# Altium PCB PCB1.PcbDoc (part 1 of 2)
Units mm, origin at the board's own origin, x right, y up, seen from the top; angles counter-clockwise.
Board outline 120.73 x 162.56 mm, 2 copper layers (Top Layer, Bottom Layer); 171 components, 125 nets, 579 pads, 168 vias.
Unrouted connection lines stored in the file: 14.
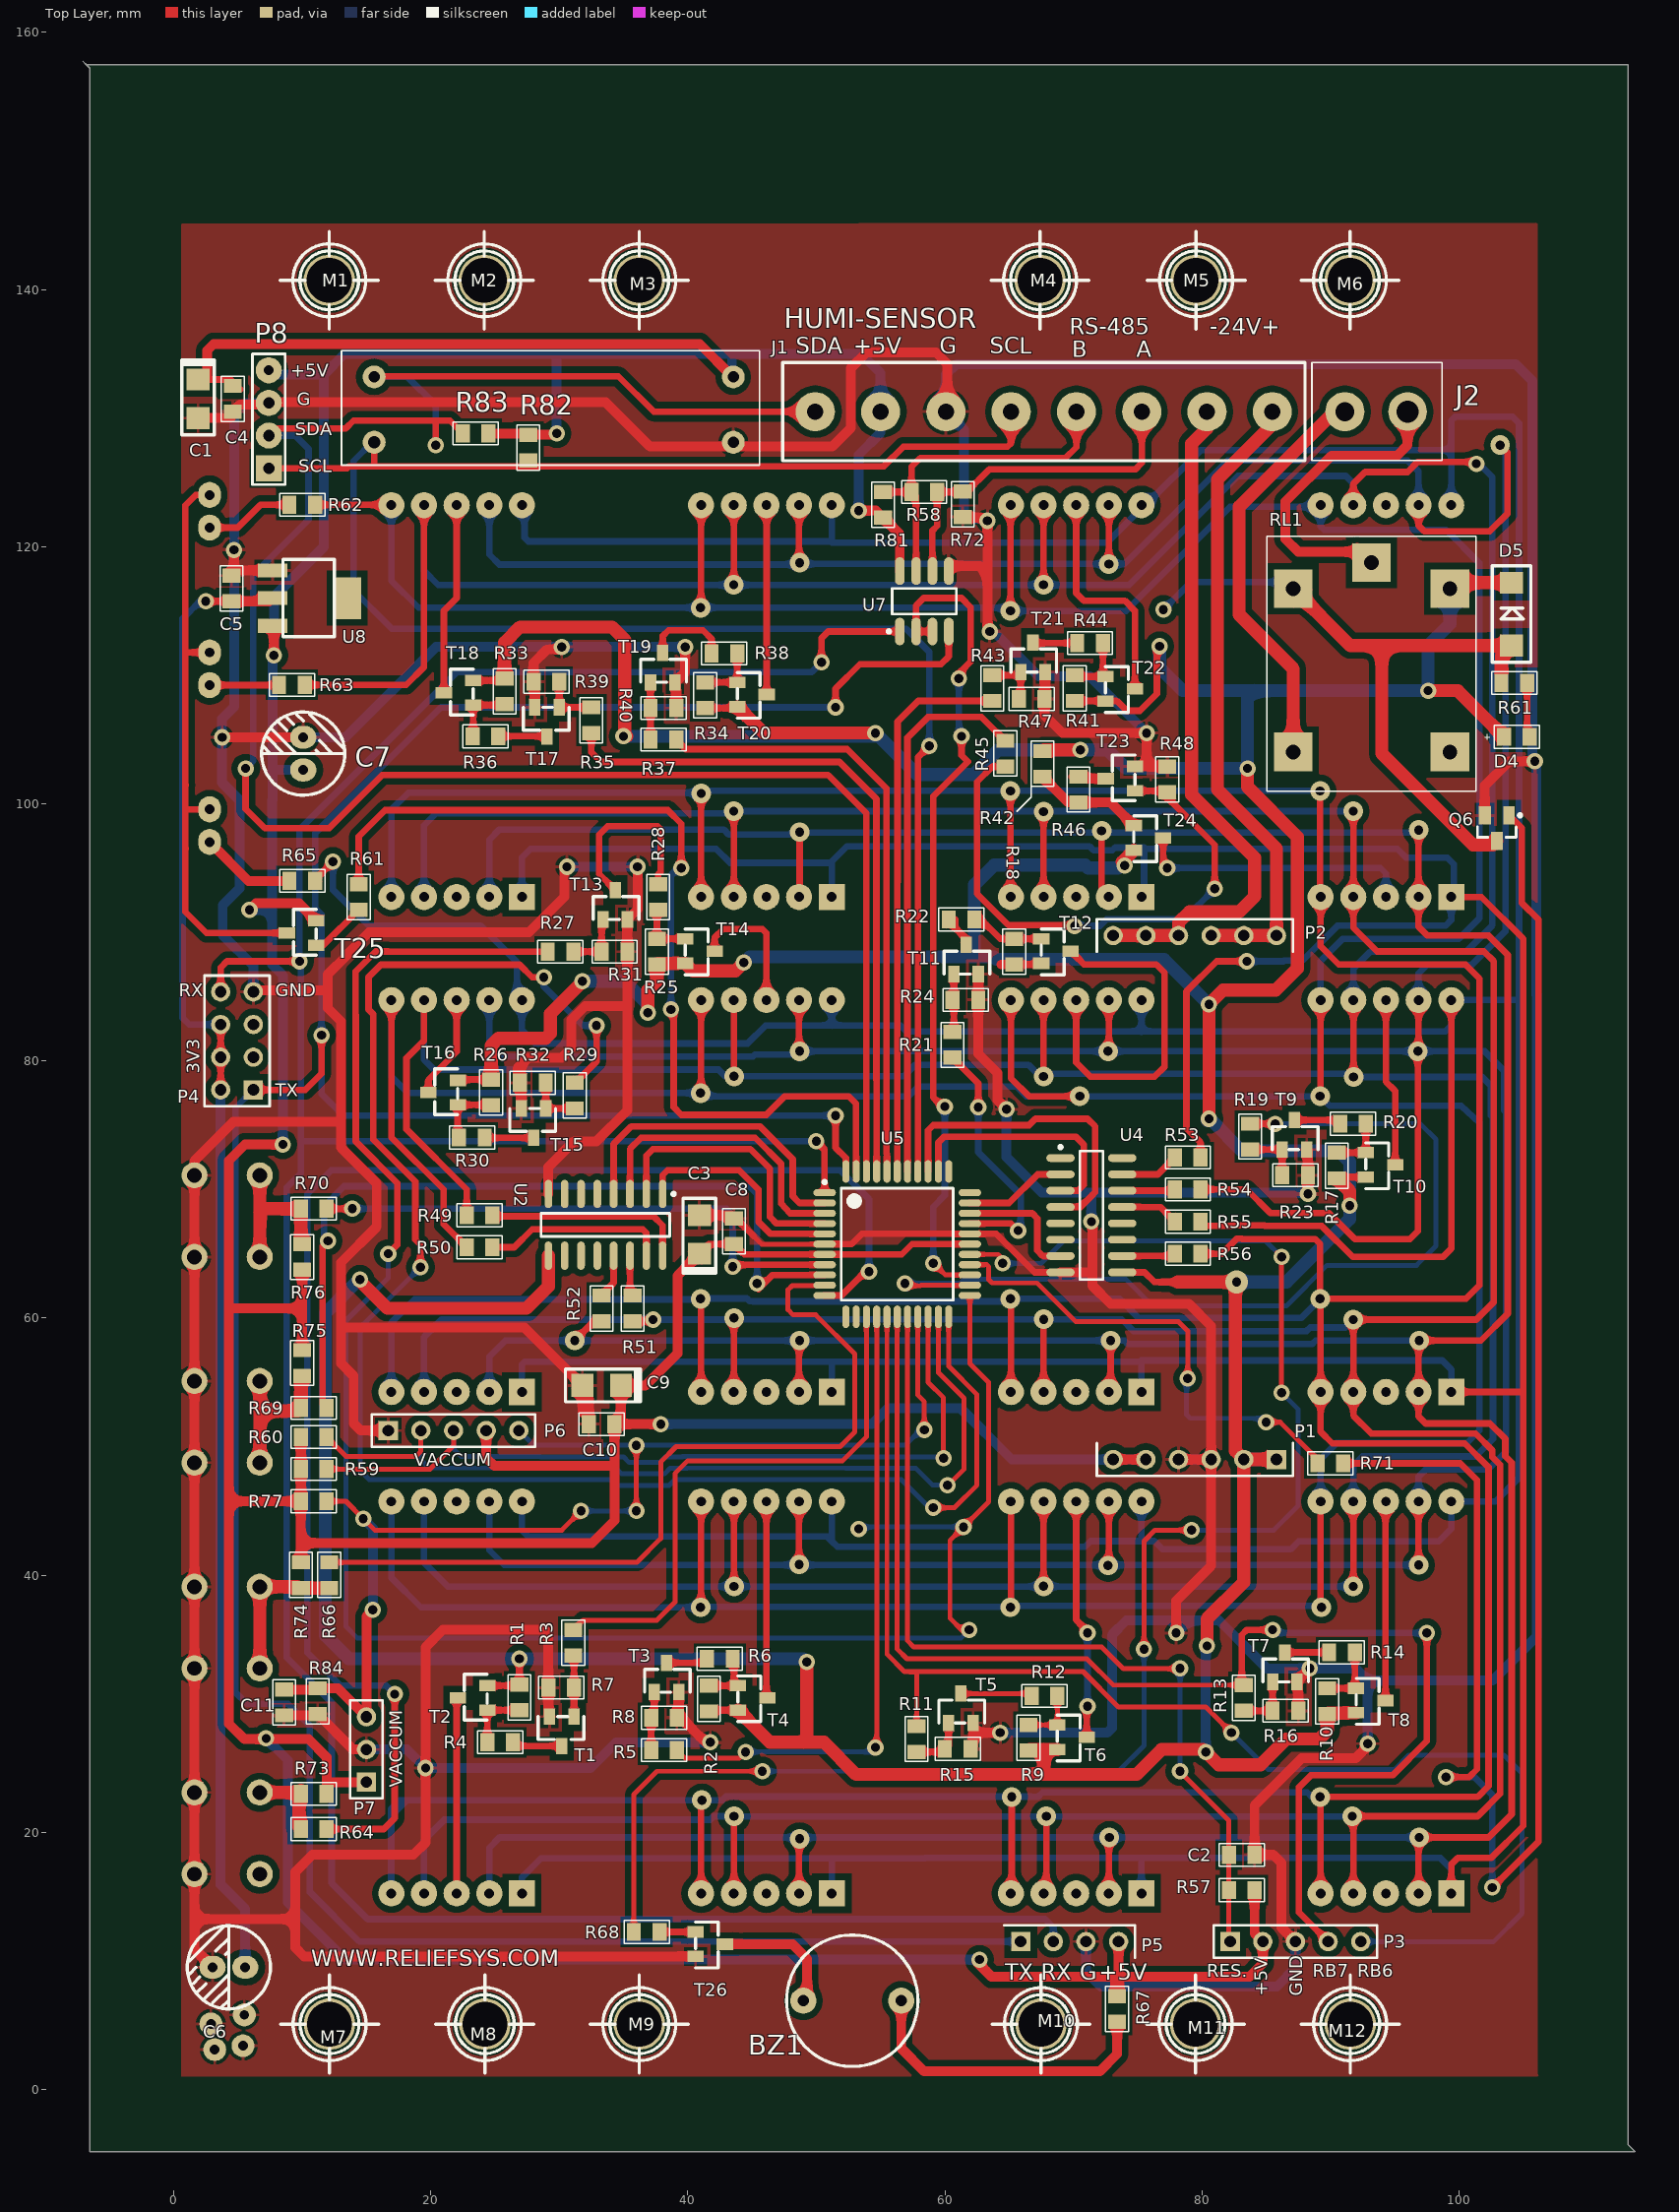
[diagram p0: Top Layer view]
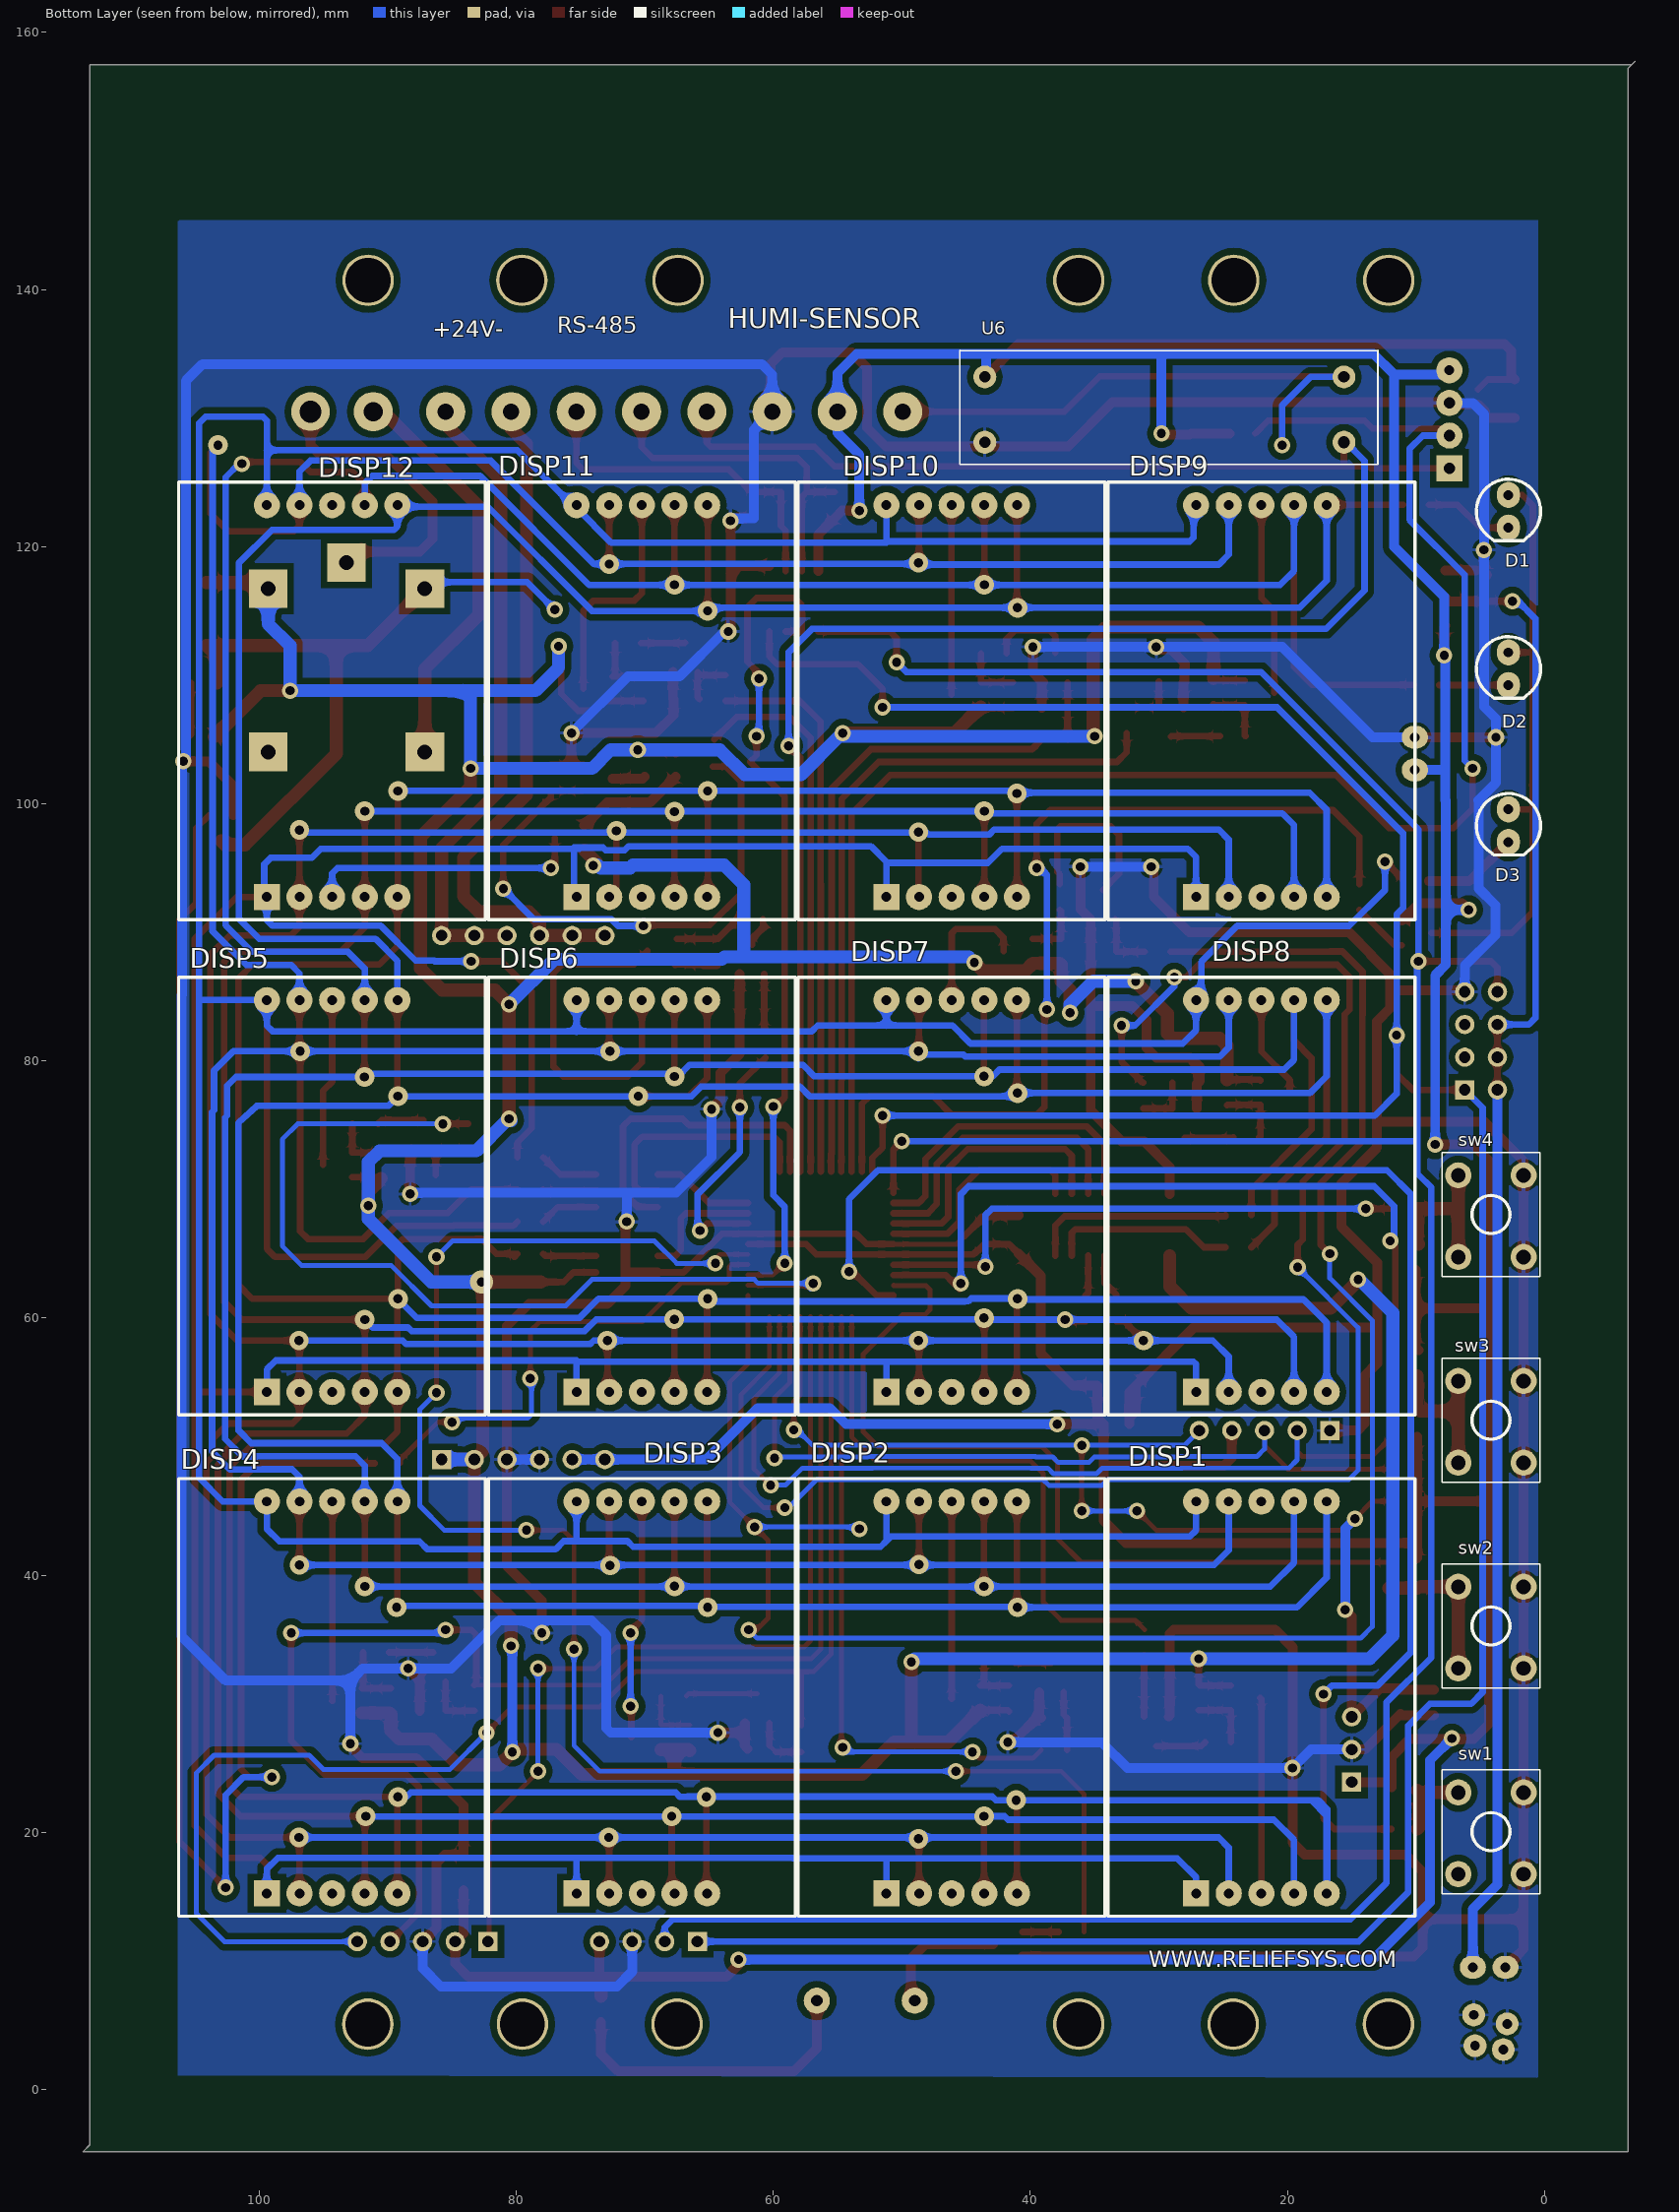
[diagram p1: Bottom Layer view, seen from below]

## Layer stack, top to bottom
Top Solder: solder mask 0.0102, Solder Resist, Dk 3.5
Top Layer: signal copper 0.0356
Dielectric 1: dielectric 0.32, FR-4, Dk 4.8
Bottom Layer: signal copper 0.0356
Bottom Solder: solder mask 0.0102, Solder Resist, Dk 3.5

## Board outline
-6.52,-4.826 -6.52,139.954 -6.52,157.214 -7.04,157.734 -6.786,157.48 113.17,157.48 113.17,-4.306 113.69,-4.826

## Design rules (kind name [scope] priority, off if disabled: settings)
Clearance [All] p1: gap=0.508
PolygonConnect [All] p1: connectstyle=Relief reliefconductorwidth=0.254 reliefentries=4 polygonreliefangle="90 Angle" airgapwidth=0.254
RoutingVias [All] p1: holewidth=0.711 width=1.27 viastyle="Through Hole" minholewidth=0.711 minwidth=1.27 maxholewidth=0.711 maxwidth=1.27
SolderMaskExpansion [All] p1: expansion=0.102
UnpouredPolygon [All] p1: allowunpoured=FALSE
Width [All] p1: maxlimit=5.08 minlimit=0.254 preferedwidth=0.254
29 further rules are at their usual default settings.

## Classes and differential pairs
component class Sheet1: M1 M2 M3 M4 M5 M6 M7 M8 M9 M10 M11 M12 R1 R2 R3 R4 R5 R6 R7 R8 R9 R10 R11 R12 R13 R14 R15 R16 R17 R18 R19 R20 R21 R22 R23 R24 T1 T2 T3 T4 T5 T6 T7 T8 T9 T10 T11 T12
component class Sheet2: R25 R26 R27 R28 R29 R30 R31 R32 R33 R34 R35 R36 R37 R38 R39 R40 R41 R42 R43 R44 R45 R46 R47 R48 T13 T14 T15 T16 T17 T18 T19 T20 T21 T22 T23 T24
component class Sheet3: DISP1 DISP2 DISP3 DISP4 DISP5 DISP6 DISP7 DISP8 DISP9 DISP10 DISP11 DISP12
component class Sheet4: BZ1 C9 C10 C11 D1 D2 D3 P6 P7 R59 R60 R61 R62 R63 R64 R65 R66 R67 R68 R69 R70 R73 R74 R75 R76 R77 R84 sw1 sw2 sw3 sw4 T25 T26
component class Sheet5: C1 C5 C6 C7 P1 P2 P4 P5 R49 R50 R51 R52 R53 R54 R55 R56 U2 U4 U8
component class Sheet6: C2 C3 C4 C8 D4 D5 J1 J2 P3 P8 Q6 R57 R58 R61 R71 R72 R81 R82 R83 RL1 U5 U6 U7

## Components (designator, comment, footprint, x,y, rotation, side; value= is the part's Value field where it differs from the comment)
BZ1 "Buzzer" Buzze 52.8,6.9 r180 top
C1 "CAP" CAPACITOR 1.9,133 r270 top
C2 "Cap" RES0805 83.1,18.25 r180 top
C3 "CAP" CAPACITOR 40.9,65 r90 top
C4 "Cap" RES0805 4.6,131.5 r270 top
C5 "Cap" RES0805 4.5,116.75 r270 top
C6 "Cap" CAP_220uF#1 4.3,9.5 r180 top
C7 "Cap" CAP_220uF#2 10.082,103.9 r90 top
C8 "Cap" RES0805 43.6,66.75 r90 top
C9 "CAP" CAPACITOR 34.8,54.75 r180 top
C10 "Cap" RES0805 33.3,51.75 r180 top
C11 "Cap" RES0805 8.6,30.1 r90 top
D1 "LED" LED3MM 2.8,122.75 r270 bottom
D2 "LED" LED3MM 2.8,110.5 r270 bottom
D3 "LED" LED3MM 2.8,98.3 r270 bottom
D4 "LED" 0805_led 103.5,105.2 r0 top
D5 "DIODE-SS14" DO-214AC 104.1,115.1 r270 top
DISP1 "SP100012AR" SP10012AR-HILIGHT 27.1,15.25 r90 bottom
DISP2 "SP100012AR" SP10012AR-HILIGHT 51.2,15.25 r90 bottom
DISP3 "SP100012AR" SP10012AR-HILIGHT 75.3,15.25 r90 bottom
DISP4 "SP100012AR" SP10012AR-HILIGHT 99.4,15.25 r90 bottom
DISP5 "SP100012AR" SP10012AR-HILIGHT 99.4,54.25 r90 bottom
DISP6 "SP100012AR" SP10012AR-HILIGHT 75.3,54.25 r90 bottom
DISP7 "SP100012AR" SP10012AR-HILIGHT 51.2,54.25 r90 bottom
DISP8 "SP100012AR" SP10012AR-HILIGHT 27.1,54.25 r90 bottom
DISP9 "SP100012AR" SP10012AR-HILIGHT 27.1,92.75 r90 bottom
DISP10 "SP100012AR" SP10012AR-HILIGHT 51.2,92.75 r90 bottom
DISP11 "SP100012AR" SP10012AR-HILIGHT 75.3,92.75 r90 bottom
DISP12 "SP100012AR" SP10012AR-HILIGHT 99.4,92.75 r90 bottom
J1 "HEADER 8" "HEADER AC" 67.7,130.5 r90 top
J2 "Header2" HEADER2 96,130.5 r180 top
M1 "MH" "Mounting hole" 12.11,140.716 r0 top
M2 "MH" "Mounting hole" 24.17,140.716 r0 top
M3 "MH" "Mounting hole" 36.23,140.716 r0 top
M4 "MH" "Mounting hole" 67.41,140.716 r0 top
M5 "MH" "Mounting hole" 79.55,140.716 r0 top
M6 "MH" "Mounting hole" 91.52,140.716 r0 top
M7 "MH" "Mounting hole" 12.13,5.08 r0 top
M8 "MH" "Mounting hole" 24.21,5.08 r0 top
M9 "MH" "Mounting hole" 36.23,5.08 r0 top
M10 "MH" "Mounting hole" 67.48,5.08 r0 top
M11 "MH" "Mounting hole" 79.51,5.08 r0 top
M12 "MH" "Mounting hole" 91.54,5.08 r0 top
P1 "Header 6" HDR1X6#1 85.8,49 r180 top
P2 "Header 6" HDR1X6#2 73.1,89.75 r0 top
P3 "Header 5" HDR1X5 82.2,11.5 r0 top
P4 "Header 4X2A" HDR2X4_CEN 6.2,77.75 r90 top
P5 "Header 4" HDR1X4#1 65.9,11.5 r0 top
P6 "Header 5" HDR1X5 16.7,51.25 r0 top
P7 "Header 3" HDR1X3 15,23.9 r90 top
P8 "Header 4" HDR1X4#2 7.4,126.1 r90 top
Q6 "BC547." SOT23_L 103.9,99.1 r270 top
R1 "Res" RES0805 26.9,30.5 r90 top
R2 "Res" RES0805 41.65,30.4 r270 top
R3 "Res" RES0805 31.1,34.75 r90 top
R4 "Res" RES0805 25.4,27 r0 top
R5 "Res" RES0805 38.15,26.4 r0 top
R6 "Res" RES0805 42.5,33.5 r180 top
R7 "Res" RES0805 30.15,31.25 r180 top
R8 "Res" RES0805 38.15,28.9 r0 top
R9 "Res" RES0805 66.5,27.35 r270 top
R10 "Res" RES0805 89.75,30.2 r270 top
R11 "Res" RES0805 57.8,27.25 r90 top
R12 "Res" RES0805 67.75,30.6 r180 top
R13 "Res" RES0805 83.25,30.45 r90 top
R14 "Res" RES0805 90.9,34 r180 top
R15 "Res" RES0805 61,26.5 r0 top
R16 "Res" RES0805 86.5,29.45 r0 top
R17 "Res" RES0805 90.5,71.861 r270 top
R18 "Res" RES0805 65.4,88.5 r270 top
R19 "Res" RES0805 83.75,74.111 r90 top
R20 "Res" RES0805 91.75,75.111 r180 top
R21 "Res" RES0805 60.6,81.25 r270 top
R22 "Res" RES0805 61.3,91 r180 top
R23 "Res" RES0805 87.25,71.111 r0 top
R24 "Res" RES0805 61.6,84.75 r0 top
R25 "Res" RES0805 37.6,88.5 r270 top
R26 "Res" RES0805 24.7,77.55 r90 top
R27 "Res" RES0805 30.1,88.5 r180 top
R28 "Res" RES0805 37.7,92.75 r90 top
R29 "Res" RES0805 31.2,77.3 r90 top
R30 "Res" RES0805 23.2,74.05 r0 top
R31 "Res" RES0805 34.3,88.5 r0 top
R32 "Res" RES0805 27.95,78.3 r180 top
R33 "Res" RES0805 25.75,108.75 r90 top
R34 "Res" RES0805 41.35,108.45 r270 top
R35 "Res" RES0805 32.5,106.5 r270 top
R36 "Res" RES0805 24.25,105.25 r0 top
R37 "Res" RES0805 38.1,105 r0 top
R38 "Res" RES0805 42.85,111.7 r180 top
R39 "Res" RES0805 29,109.5 r180 top
R40 "Res" RES0805 38.1,107.45 r0 top
R41 "Res" RES0805 70.1,109 r270 top
R42 "Res" RES0805 67.6,103.1 r90 top
R43 "Res" RES0805 63.7,109 r270 top
R44 "Res" RES0805 71.3,112.5 r180 top
R45 "Res" RES0805 64.7,103.9 r90 top
R46 "Res" RES0805 70.4,101.1 r90 top
R47 "Res" RES0805 66.75,108.15 r0 top
R48 "Res" RES0805 77.3,101.9 r90 top
R49 "Res" RES0805 23.8,68 r180 top
R50 "Res" RES0805 23.8,65.5 r180 top
R51 "Res" RES0805 35.7,60.75 r270 top
R52 "Res" RES0805 33.3,60.75 r270 top
R53 "Res" RES0805 78.9,72.5 r0 top
R54 "Res" RES0805 78.9,70 r0 top
R55 "Res" RES0805 78.9,67.5 r0 top
R56 "Res" RES0805 78.9,65 r0 top
R57 "Res" RES0805 83.1,15.5 r0 top
R58 "Res" RES0805 58.4,124.25 r180 top
R59 "Res" RES0805 10.9,48.25 r0 top
R60 "Res" RES0805 10.9,50.75 r0 top
R61 "Res" RES0805 104.3,109.4 r0 top
R61 "Res" RES0805 14.4,92.75 r270 top
R62 "Res" RES0805 10,123.25 r0 top
R63 "Res" RES0805 9.2,109.25 r0 top
R64 "Res" RES0805 10.9,20.25 r0 top
R65 "Res" RES0805 10,94 r0 top
R66 "Res" RES0805 12.1,40 r90 top
R67 "Res" RES0805 73.4,6.25 r90 top
R68 "Res" RES0805 36.8,12.25 r0 top
R69 "Res" RES0805 10.9,53 r0 top
R70 "Res" RES0805 10.9,68.5 r0 top
R71 "Res" RES0805 90,48.7 r180 top
R72 "Res" RES0805 61.4,123.3 r90 top
R73 "Res" RES0805 10.9,23 r0 top
R74 "Res" RES0805 9.9,40 r90 top
R75 "Res" RES0805 10,56.5 r90 top
R76 "Res" RES0805 10,64.75 r270 top
R77 "Res" RES0805 10.9,45.75 r180 top
R81 "Res" RES0805 55.2,123.25 r90 top
R82 "Res" RES0805 27.6,127.7 r270 top
R83 "Res" RES0805 23.5,128.8 r180 top
R84 "Res" RES0805 11.2,30.2 r270 top
RL1 "RELAY-5pin" RELAY-5pin 93.2,111.4 r90 top
sw1 "Switch-" SWITCH_200/250 6.7,16.75 r90 bottom
sw2 "Switch-" SWITCH_200/250 6.7,32.75 r90 bottom
sw3 "Switch-" SWITCH_200/250 6.7,48.75 r90 bottom
sw4 "Switch-" SWITCH_200/250 6.7,64.75 r90 bottom
T1 "BC848" SOT23 31.15,29 r270 top
T2 "BC857" SOT23 24.4,29.5 r180 top
T3 "BC848" SOT23 37.4,30.9 r90 top
T4 "BC857" SOT23 43.9,31.4 r0 top
T5 "BC848" SOT23 60.3,28.5 r90 top
T6 "BC857" SOT23 68.75,28.35 r0 top
T7 "BC848" SOT23 85.5,31.7 r90 top
T8 "BC857" SOT23 92,31.2 r0 top
T9 "BC848" SOT23 86.25,73.111 r90 top
T10 "BC857" SOT23 92.75,72.861 r0 top
T11 "BC848" SOT23 60.7,86.75 r90 top
T12 "BC857" SOT23 67.5,89.5 r0 top
T13 "BC848" SOT23 33.4,91 r90 top
T14 "BC857" SOT23 39.8,89.5 r0 top
T15 "BC848" SOT23 28.95,76.3 r270 top
T16 "BC857" SOT23 22.1,76.58 r180 top
T17 "BC848" SOT23 30,107.5 r270 top
T18 "BC857" SOT23 23.31,107.68 r180 top
T19 "BC848" SOT23 37.1,109.45 r90 top
T20 "BC857" SOT23 43.85,109.45 r0 top
T21 "BC848" SOT23 65.9,110.25 r90 top
T22 "BC857" SOT23 72.5,109.9 r0 top
T23 "BC848" SOT23 74.8,101 r180 top
T24 "BC857" SOT23 74.7,98.3 r0 top
T25 "BC857" SOT23 11.1,89 r180 top
T26 "BC848" SOT23 40.6,12.25 r0 top
U2 "ULN2003AD" D016_N 33.6,67.25 r270 top
U4 "ULN2003AD" D016_N 71.4,68 r0 top
U5 "PIC16F887T-E/PT" TQFP-PT44_N 56.3,65.75 r0 top
U6 "Humi-sen-v3" HUMI-SEN 15.6,133.2 r180 bottom
U7 "RS485" RS485 58.4,115.75 r90 top
U8 "Reg" LM1117 10.6,116 r270 top

## Footprints (in the part's own frame and the unit in brackets; to place one, negate y for a bottom-side part, rotate by r counter-clockwise, add the part's x,y. Pads: shape width x height; smd on the part's side, far side on the other; paste and mask are expansions set on the pad)
0805_led [mm]
  rect 1.1x1.4 smd: 1(0,0) 2(2,0)
  silkscreen extent -1.5,-0.89 2.77,0.89
Buzze [mil]
  round 80 hole 35: 1(-150,0) 2(150,0)
  silkscreen extent -201,-201 201,201
CAP_220uF#1 [mil]
  oval 80x70 hole 30: 1(-50,0) 2(50,0)
  silkscreen extent -127,-127 127,127
CAP_220uF#2 [mil]
  oval 70x80 hole 30: 1(-50,0) 2(50,0)
  silkscreen extent -127,-127 127,127
CAPACITOR [mm]
  rect 1.7x1.8 smd: 1(0,0) 2(3,0)
  silkscreen extent -1.52,-1.27 4.32,1.27
D016_N [mm] "SOIC, 16-Leads, Body 9.9x3.9mm, Pitch 1.27mm, IPC Medium Density"
  oval 2.2x0.6 smd: 1(-2.4,4.445) 2(-2.4,3.175) 3(-2.4,1.905) 4(-2.4,0.635) 5(-2.4,-0.635) 6(-2.4,-1.905) 7(-2.4,-3.175) 8(-2.4,-4.445) 9(2.4,-4.445) 10(2.4,-3.175) 11(2.4,-1.905) 12(2.4,-0.635) 13(2.4,0.635) 14(2.4,1.905) 15(2.4,3.175) 16(2.4,4.445)
  silkscreen extent -2.52,-5 0.9,5.42, body extent -2,-5 2,5, height 1.75
DO-214AC [mm] "SMD DIODE"
  rect 1.7x1.8 smd: 1(2.8,0) 2(-2.1,0)
  silkscreen extent -3.4,-1.5 4.1,1.5
HDR1X3 [mm] "Connector; Header; 3 Position"
  rect 1.5x1.5 hole 0.9: 1(0,0)
  round 1.5 hole 0.9: 2(2.54,0) 3(5.08,0)
  silkscreen extent -1.27,-1.27 6.35,1.27
HDR1X4#1 [mm] "Connector; Header; 4 Position"
  rect 1.5x1.5 hole 0.9: 1(0,0)
  round 1.5 hole 0.9: 2(2.54,0) 3(5.08,0) 4(7.62,0)
  silkscreen extent -1.27,-1.27 8.89,1.27
HDR1X4#2 [mm] "Connector; Header; 4 Position"
  rect 2.032x2.032 hole 0.889: 1(0,0)
  round 2.032 hole 0.889: 2(2.54,0) 3(5.08,0)
  round 2.032 hole 0.762: 4(7.62,0)
  silkscreen extent -1.27,-1.27 8.89,1.27
HDR1X5 [mm] "Connector; Header; 5 Position"
  rect 1.5x1.5 hole 0.9: 1(0,0)
  round 1.5 hole 0.9: 2(2.54,0) 3(5.08,0) 4(7.62,0) 5(10.16,0)
  silkscreen extent -1.27,-1.27 11.43,1.27
HDR1X6#1 [mm] "Connector; Header; 6 Position"
  rect 1.5x1.5 hole 0.9: 1(0,0)
  round 1.5 hole 0.9: 2(2.54,0) 3(5.08,0) 4(7.62,0) 5(10.16,0) 6(12.7,0)
  silkscreen extent -1.27,-1.27 13.97,1.27
HDR1X6#2 [mm] "Connector; Header; 6 Position"
  round 1.5 hole 0.9: 1(0,0) 2(2.54,0) 3(5.08,0) 4(7.62,0) 5(10.16,0) 6(12.7,0)
  silkscreen extent -1.27,-1.27 13.97,1.27
HDR2X4_CEN [mm] "Connector; Header; 4x2 Position"
  rect 1.5x1.5 hole 0.9: 1(0,0)
  round 1.5 hole 0.9: 2(2.54,0) 3(5.08,0) 4(7.62,0) 5(0,2.54) 6(2.54,2.54) 7(5.08,2.54) 8(7.62,2.54)
  silkscreen extent -1.27,-1.27 8.89,3.81
HEADER2 [mil]
  round 118.11 hole 66.93: 1(0,0)
  round 120 hole 58: 2(192,0)
  silkscreen extent -106,-150 293,150
"HEADER AC" [mil]
  round 120 hole 50: 1(0,700) 2(0,500) 3(0,300) 4(0,100) 5(0,-100) 6(0,-300) 7(0,-500) 8(0,-700)
  silkscreen extent -150,-800 150,800
HUMI-SEN [mil]
  round 70 hole 35: 1(0,0) 3(-1100,-200) 4(-1100,0)
  round 70 hole 37: 2(0,-200)
LED3MM [mil]
  oval 80x70 hole 30: 1(-50,0) 2(50,0)
  silkscreen extent -98,-98 90,98
LM1117 [mm]
  rect 1.1x2.3 smd: 1(-2.15,-2.9) 2(0,-2.9) 3(2.15,-2.9)
  rect 3.25x2.15 smd: 4(0,2.9)
  silkscreen extent -3,-2.1 3,1.9
"Mounting hole" [mm]
  round 4 hole 3.5: ""(0,0)
  silkscreen extent -3.81,-3.81 3.81,3.81
RELAY-5pin [mil] "Relay"
  rect 118.11x118.11 hole 45: 1(210,240) 2(290,0) 3(210,-240) 4(-290,-240) 5(-290,240)
  silkscreen extent -410,-320 370,321
RES0805 [mm]
  rect 1.1x1.4 smd: 1(-1,0) 2(1,0)
  silkscreen extent -1.75,-0.89 1.77,0.89
RS485 [mm] "S0IC 8PIN"
  oval 2.154x0.752 smd: 1(-2.35,1.905) 2(-2.35,0.635) 3(-2.35,-0.635) 4(-2.35,-1.905) 5(2.35,-1.905) 6(2.35,-0.635) 7(2.35,0.635) 8(2.35,1.905)
  silkscreen extent -2.47,-2.5 1,2.88, body extent -1.95,-2.45 1.95,2.45, height 1.75
SOT23 [mil] "SMD DIODE 4148"
  rect 50x35 smd: 1(0,0) 2(0,-75) 3(90,-37.5)
  silkscreen extent 0,-110 70,30
SOT23_L [mm] "SOT23, 3-Leads, Body 2.9x1.3mm, Pitch 0.95mm, Lead Span 2.3mm, IPC High Density"
  rect 1.4x0.89 smd: 1(0,0) 3(2,-0.95)
  rect 1.4x0.96 smd: 2(0,-1.9)
  silkscreen extent -0.12,-2.45 1.7,0.97, body extent 0.3,-2.45 1.7,0.55, height 1.1
SP10012AR-HILIGHT [mil]
  rect 80x80 hole 30: 1(0,0)
  round 80 hole 30: 2(0,-100) 3(0,-200) 4(0,-300) 5(0,-400) 6(1200,-400) 7(1200,-300) 8(1200,-200) 9(1200,-100) 10(1200,0)
  silkscreen extent -70,-670 1270,270
SWITCH_200/250 [mil]
  round 80 hole 45: 1(0,0) 2(0,-200) 3(250,-200) 4(250,0)
  silkscreen extent -60,-250 320,50
TQFP-PT44_N [mm] "Thin QFP, 44-Leads, Body 10x10mm, Pitch 0.8mm, IPC Medium Density"
  oval 1.75x0.55 smd: 1(-5.65,4) 2(-5.65,3.2) 3(-5.65,2.4) 4(-5.65,1.6) 5(-5.65,0.8) 6(-5.65,0) 7(-5.65,-0.8) 8(-5.65,-1.6) 9(-5.65,-2.4) 10(-5.65,-3.2) 11(-5.65,-4) 23(5.65,-4) 24(5.65,-3.2) 25(5.65,-2.4) 26(5.65,-1.6) 27(5.65,-0.8) 28(5.65,0) 29(5.65,0.8) 30(5.65,1.6) 31(5.65,2.4) 32(5.65,3.2) 33(5.65,4)
  oval 0.55x1.75 smd: 12(-4,-5.65) 13(-3.2,-5.65) 14(-2.4,-5.65) 15(-1.6,-5.65) 16(-0.8,-5.65) 17(0,-5.65) 18(0.8,-5.65) 19(1.6,-5.65) 20(2.4,-5.65) 21(3.2,-5.65) 22(4,-5.65) 34(4,5.65) 35(3.2,5.65) 36(2.4,5.65) 37(1.6,5.65) 38(0.8,5.65) 39(0,5.65) 40(-0.8,5.65) 41(-1.6,5.65) 42(-2.4,5.65) 43(-3.2,5.65) 44(-4,5.65)
  silkscreen extent -5.77,-4.35 4.35,4.95, body extent -5,-5 5,5, height 1.2

## Part data
BZ1: library part Buzzer_small, "Buzzer_small"
C1 C3 C9: library part CAP_GT_SMD, "470uf"
C2 C4 C5 C8 C10 C11: library part CAP_104_SMD, "Cap_104_SMD"
C6 C7: library part CAP_220uF, "Cap_220uF"
D1 D2 D3: library part LED_3MM, "LED_3MM"
D4: library part LED_0805, "LED_0805"
D5: "SS14"
DISP1 DISP2 DISP3 DISP4 DISP5 DISP6 DISP7 DISP8 DISP9 DISP10 DISP11 DISP12: "34mm/1200mil"
J1: "AC"
P1 P2: "Header, 6-Pin"
P3 P6: "Header, 5-Pin"
P4: "Header, 4-Pin, Dual row"
P5 P8: "Header, 4-Pin"
P7: "Header, 3-Pin"
Q6: "NPN 1 GHz Wideband Transistor"
R1 R2 R3 R4 R5 R6 R7 R8 R9 R10 R11 R12 R13 R14 R15 R16 R17 R18 R19 R20 R21 R22 R23 R24 R25 R26 R27 R28 R29 R30 R31 R32 R33 R34 R35 R36 R37 R38 R39 R40 R41 R42 R43 R44 R45 R46 R47 R48 R49 R50 R51 R52 R53 R54 R55 R56 R57 R58 R59 R60 R61 R61 R62 R63 R64 R65 R66 R67 R68 R69 R70 R71 R72 R73 R74 R75 R76 R77 R81 R82 R83 R84: library part Resistor, "Res0805"
sw1 sw2 sw3 sw4: "200/250mil"
T1 T3 T5 T7 T9 T11 T13 T15 T17 T19 T21 T23 T26: "TRANSISTOR"
U2 U4: "Darlington Transistor Array"
U5: "Flash-Based, 8-Bit CMOS Microcontroller with nanoWatt Technology, 8K (x14-Bit words) Program Memory, 624 Bytes Data Memory, 35 I/O pins, 44-Pin TQFP, Standard VDD Range, Extended Temperature, Tape and Reel"
U7: "8-Pin SO"
U8: library part LM1117

## Free pads (board coordinates)
  round 1.778 hole 0.762: 0(3.2,3.1) 1(5.4,3.4) 2(2.9,5.1) 3(5.5,5.8)

## Via types
v1: diameter 1.27, hole 0.711, Top Layer to Bottom Layer, 114 vias
v2: diameter 1.524, hole 0.711, Top Layer to Bottom Layer, 53 vias
v3: diameter 1.778, hole 0.711, Top Layer to Bottom Layer, 1 vias

## Nets (pads, with @x,y where several pads share a name; then routed paths per layer and width w, separated by ;. In a path a pad name is that pad's centre, name@x,y a point inside that pad or via, vN(x,y) a via of type N, cw(c..) or ccw(c..) an arc to the next point about the centre after c; other vN are vias at no path point)
3V3: C5.2 C6.1 P4.5 P4.6 P4.7 U8.2 | length 116
  Top Layer w0.508: v1(2.5,115.75) C5.2@4.5,115.75 ; P4.5@3.66,77.75 P4.6@3.66,80.29 P4.7@3.66,82.83
  Top Layer w0.762: C5.2@4.5,115.75 7.45,115.75 U8.2@7.7,116
  Bottom Layer w0.508: v1(2.5,115.75) 2.05,115.75 0.7,114.4 0.7,83.35 1.22,82.83 P4.7@3.66,82.83
  Bottom Layer w0.762: P4.5@3.66,77.75 3.66,15.94 5.57,14.03 C6.1@5.57,9.5
7_SEGMENT1: DISP1.3 DISP1.8 T2.3 | length 15.2
  Top Layer w0.508: DISP1.3@22.02,15.25 22.02,30.359 T2.3@22.114,30.453
7_SEGMENT2: DISP2.3 DISP2.8 T4.3 | length 15.4
  Top Layer w0.508: T4.3@46.12,30.382 T4.3@46.186,30.448 46.12,30.514 DISP2.8@46.12,45.73
7_SEGMENT3: DISP3.3 DISP3.8 T6.3 | length 19.5
  Top Layer w0.508: DISP3.3@70.22,15.25 DISP3.3@70.436,15.466 ; DISP3.8@70.22,45.73 70.22,36.53 71.1,35.65 v1(71.1,35.5) ; T6.3@71.036,27.397 71.036,29.736 v1(71.1,29.8)
  Bottom Layer w0.508: v1(71.1,29.8) 71.1,35.15 70.75,35.5 v1(71.1,35.5)
7_SEGMENT4: DISP4.3 DISP4.8 T8.3 | length 15.5
  Top Layer w0.508: T8.3@94.32,30.213 T8.3@94.286,30.247 94.286,45.696 DISP4.8@94.32,45.73
7_SEGMENT5: DISP5.3 DISP5.8 T10.3 | length 13.1
  Top Layer w0.508: DISP5.8@94.32,84.73 94.32,78.38 94.95,77.75 95.036,77.664 T10.3@95.036,71.908
7_SEGMENT6: DISP6.3 DISP6.8 T12.3 | length 28.9
  Top Layer w0.508: DISP6.8@69.786,85.164 DISP6.8@70.22,84.73 70.22,79.88 71.33,78.77 76.32,78.77 77.1,79.55 77.1,86.85 76.45,87.5 ; T12.3@69.786,88.547 70.833,87.5 76.45,87.5 ; 76.8,87.15 76.45,87.5
7_SEGMENT7: DISP7.3 DISP7.8 T14.3 | length 10.7
  Top Layer w0.508: T14.3@42.086,88.547 42.086,89.586 42.75,90.25 45.8,90.25 46.12,89.93 46.12,88.03 46.12,87.63 DISP7.8@46.12,84.73
7_SEGMENT8: DISP8.3 DISP8.8 T16.3 | length 8.1
  Top Layer w0.508: T16.3@19.814,77.532 19.814,78.514 22.02,80.72 DISP8.8@22.02,84.73
7_SEGMENT9: DISP9.3 DISP9.8 T18.3 | length 15
  Top Layer w0.508: T18.3@21.024,108.633 21.024,115.004 22.02,116 DISP9.8@22.02,123.23
7_SEGMENT10: DISP10.3 DISP10.8 T20.3 | length 14.7
  Top Layer w0.508: DISP10.8@46.12,123.23 46.136,123.214 T20.3@46.136,108.498
7_SEGMENT11: DISP11.3 DISP11.8 T22.3 | length 18.1
  Top Layer w0.508: DISP11.8@70.2,123.21 DISP11.8@70.22,123.23 70.22,116.83 70.22,116.38 70.8,115.8 71.25,115.8 74,115.8 74.786,115.014 74.786,113.664 T22.3@74.786,108.948
7_SEGMENT12: DISP12.3 DISP12.8 T24.3 | length 21.5
  Top Layer w0.508: T24.3@76.986,97.347 76.986,95.314 v1(77.3,95)
  Bottom Layer w0.508: v1(77.3,95) 92.07,95 93.9,95 94.32,94.58 DISP12.3@94.32,92.75
7SEGMENT_A: DISP1.7 DISP2.7 DISP3.7 DISP4.7 DISP5.7 DISP6.7 DISP7.7 DISP8.7 DISP9.7 DISP10.7 DISP11.7 DISP12.7 R49.2 R63.2 | length 449.4
  Top Layer w0.508: R63.2@10.2,109.25 18.1,109.25 19.48,110.63 DISP9.7@19.48,123.23 ; DISP8.7@19.48,84.73 19.48,81.58 18.118,80.218 18.118,74.682 22.8,70 R49.2@22.8,68 ; DISP2.7@43.58,45.73 43.6,45.71 v2(43.6,39.12) ; DISP7.7@43.58,84.73 43.6,84.71 v2(43.6,78.8) ; v2(43.58,117.04) DISP10.7@43.58,123.23 ; v2(67.68,39.14) DISP3.7@67.68,45.73 ; v2(67.68,78.79) DISP6.7@67.68,84.73 ; v2(67.68,117.04) DISP11.7@67.68,123.23 ; DISP12.7@91.7,122.75 91.5,122.95 DISP12.7@91.78,123.23 ; v2(91.78,39.12) DISP4.7@91.78,45.73 DISP4.7@91.911,45.73 ; DISP5.7@91.78,84.73 92,84.51 91.8,84.31 v2(91.8,78.75) ; DISP12.7@92,123.45 DISP12.7@91.78,123.23 ; v1(101.35,126.45) 101.2,126.6 96.8,126.6 96,125.8 92.7,125.8 91.78,124.88 DISP12.7@91.78,123.23
  Bottom Layer w0.508: DISP1.7@19.48,45.73 19.48,40.97 21.33,39.12 v2(43.6,39.12) v2@67.7,39.12 ; DISP8.7@19.48,84.73 19.48,80.1 20.259,79.321 42.4,79.321 42.921,78.8 v2(43.6,78.8) 56.8,78.8 57.7,79.7 66.5,79.7 67.41,78.79 v2(67.68,78.79) 67.89,79 92.01,79 v2@91.7,78.69 ; DISP9.7@19.48,123.23 19.48,118.12 20.58,117.02 v2@43.6,117.02 ; v2(43.58,117.04) v2@43.6,117.02 ; v2(67.68,39.14) v2@67.7,39.12 ; v2(91.78,39.12) v2@67.7,39.12 ; DISP4.7@91.78,45.73 91.78,48.53 92.5,49.25 100.163,49.25 100.179,49.234 101.284,49.234 102.646,50.596 102.646,75.582 102.484,75.744 102.484,78.066 101.8,78.75 v2(91.8,78.75) ; DISP5.7@91.78,84.73 91.78,87.18 93.084,88.484 100.534,88.484 102.6,90.55 102.6,125.4 101.55,126.45 v1(101.35,126.45) ; DISP12.7@91.78,123.23 91.78,124.92 91.2,125.5 82.8,125.5 74.32,117.02 v2@43.6,117.02
7SEGMENT_B: DISP1.6 DISP2.6 DISP3.6 DISP4.6 DISP5.6 DISP6.6 DISP7.6 DISP8.6 DISP9.6 DISP10.6 DISP11.6 DISP12.6 R50.2 R62.2 | length 456
  Top Layer w0.508: R62.2@11,123.25 16.92,123.25 DISP9.6@16.94,123.23 ; 16.94,74.25 16.94,74.06 ; DISP8.6@16.94,84.73 16.94,74.06 ; R50.2@22.8,65.5 21,67.3 21,70 16.94,74.06 ; v2(41,37.5) 41,37.08 41.04,37.04 DISP2.6@41.04,45.73 ; v2(41,77.5) 41.04,77.54 DISP7.6@41.04,84.73 ; v2(41,115.25) 41.04,115.29 DISP10.6@41.04,123.23 ; v2(65.1,37.5) 65.1,37.18 65.14,37.14 DISP3.6@65.14,45.73 ; v2(65.1,115) 65.1,123.19 DISP11.6@65.14,123.23 ; 65.14,79.5 65.14,78.66 ; DISP6.6@65.14,84.73 65.14,78.66 ; v2(70.5,77.25) 66.55,77.25 65.14,78.66 ; v2(89.2,77.25) 89.24,77.29 DISP5.6@89.24,84.73 ; DISP4.6@89.24,45.73 89.24,37.04 89.3,37.1 v2(89.3,37.5) ; DISP12.6@89.24,123.23 89.3,123.17 DISP12.6@89.8,122.67
  Bottom Layer w0.508: DISP1.6@16.94,45.73 16.94,39.81 19.25,37.5 40.4,37.5 v2@40.7,37.8 ; DISP8.6@16.94,84.73 16.94,78.81 18.25,77.5 v2(41,77.5) 41.25,77.25 57.169,77.25 57.919,78 65.6,78 66.35,77.25 v2(70.5,77.25) v2(89.2,77.25) 89.95,76.5 100.173,76.5 101.6,75.178 101.6,51.25 100.6,50.25 100.584,50.266 90.466,50.266 89.24,49.04 DISP4.6@89.24,45.73 ; DISP9.6@16.94,123.23 16.94,117.36 19.05,115.25 v2(41,115.25) v2@65.35,115.25 ; v2@41,37.55 65.1,37.55 v2@65.2,37.8 ; v2(65.1,37.5) 65.216,37.616 70.089,37.616 70.1,37.627 89.173,37.627 v2(89.3,37.5) v2@89.523,37.723 ; v2@65.8,114.8 v2@65.6,115 ; DISP5.6@89.24,84.73 89.24,87.781 90.959,89.5 100,89.5 101.584,91.084 101.584,118.716 99,121.3 89.5,121.3 89.24,121.56 DISP12.6@89.24,123.23 89.11,123.1 82.2,123.1 74.1,115 v2@65.6,115 ; v2@65.35,115.25 v2@65.6,115 ; v2@65.35,115.25 v2(65.1,115) v2@65.6,115
7SEGMENT_C: DISP1.4 DISP2.4 DISP3.4 DISP4.4 DISP5.4 DISP6.4 DISP7.4 DISP8.4 DISP9.4 DISP10.4 DISP11.4 DISP12.4 R51.2 | length 396
  Top Layer w0.508: R51.2@35.7,59.75 37.17,59.75 v1(37.3,59.88) ; DISP2.4@43.58,15.25 43.6,15.27 v2(43.6,21.25) ; DISP7.4@43.58,54.25 43.58,59.98 v2(43.6,60) ; DISP10.4@43.58,92.75 v2(43.58,99.42) ; DISP3.4@67.68,15.25 67.9,15.47 v2(67.9,21.25) ; DISP6.4@67.68,54.25 67.68,59.88 v2(67.7,59.9) ; DISP11.4@67.68,92.75 v2(67.68,99.38) ; DISP4.4@91.78,15.25 91.78,21.17 v2(91.7,21.25) 101.45,21.25 103.2,23 103.2,48.578 102.6,49.178 102.6,49.7 101.288,51.012 93.188,51.012 91.78,52.42 DISP5.4@91.78,54.25 v2(91.78,59.88) 101.341,59.88 102.711,61.25 102.711,87.739 101.934,88.516 93.634,88.516 91.78,90.37 DISP12.4@91.78,92.75 v2(91.78,99.42)
  Bottom Layer w0.508: DISP1.4@19.48,15.25 19.48,19.4 21.056,20.976 41.731,20.976 42.005,21.25 v2(43.6,21.25) 43.624,21.226 67.876,21.226 v2(67.9,21.25) 67.924,21.226 v2@67.926,21.226 ; DISP8.4@19.48,54.25 19.48,58.53 20.83,59.88 v1(37.3,59.88) v2@43.6,59.88 ; DISP9.4@19.48,92.75 19.48,98.33 20.4,99.25 43.41,99.25 v2(43.58,99.42) 43.584,99.424 91.776,99.424 v2(91.78,99.42) ; v2(43.6,60) 43.6,59.9 v2(67.7,59.9) 73.757,59.9 74.673,58.984 88.139,58.984 88.421,59.266 91.166,59.266 v2(91.78,59.88) ; v2@67.68,20.98 v2@67.926,21.226 ; v2(91.7,21.25) 91.676,21.226 v2@67.926,21.226
7SEGMENT_D: DISP1.2 DISP2.2 DISP3.2 DISP4.2 DISP5.2 DISP6.2 DISP7.2 DISP8.2 DISP9.2 DISP10.2 DISP11.2 DISP12.2 R52.2 | length 368.8
  Top Layer w0.508: v2(31.2,58.25) 32.7,59.75 R52.2@33.3,59.75 ; DISP2.2@48.66,15.25 48.66,19.46 v2(48.7,19.5) v2@48.7,19.7 ; DISP7.2@48.66,54.25 48.66,58.56 48.7,58.52 v2(48.7,58.25) ; DISP10.2@48.66,92.75 48.7,92.79 v2(48.7,97.8) ; v2(72.2,97.9) 72.2,93.31 DISP11.2@72.76,92.75 ; DISP3.2@72.76,15.25 72.76,19.56 v2(72.8,19.6) ; DISP6.2@72.76,54.25 72.9,54.39 v2(72.9,58.25) ; DISP4.2@96.86,15.25 96.86,19.56 v2(96.9,19.6) 102.3,19.6 104.1,21.4 104.1,48.755 103.6,49.255 103.6,50.6 102.4,51.8 97.4,51.8 96.86,52.34 DISP5.2@96.86,54.25 96.86,58.56 96.9,58.52 v2(96.9,58.25) 101.711,58.25 103.8,60.339 103.8,88.25 102.3,89.75 97.55,89.75 96.86,90.44 DISP12.2@96.86,92.75 v2(96.86,97.96)
  Bottom Layer w0.508: DISP1.2@24.56,15.25 24.56,18.81 25.35,19.6 v2(72.8,19.6) ; DISP8.2@24.56,54.25 24.56,57.01 25.8,58.25 v2(31.2,58.25) v2(48.7,58.25) v2@48.85,58.25 ; DISP9.2@24.56,92.75 24.56,97.21 25.35,98 42.8,98 43.2,97.6 47.9,97.6 48.1,97.8 v2(48.7,97.8) 48.75,97.75 72.883,97.75 72.904,97.77 74.902,97.77 74.922,97.75 97.07,97.75 v2(96.86,97.96) ; v2@48.6,58.6 48.6,58.5 v2@48.85,58.25 ; v2(72.2,97.9) 72.82,97.9 v2@72.92,97.8 ; v2@72.9,19.5 73,19.6 v2(96.9,19.6) ; DISP4.2@96.86,15.25 DISP4.2@97.1,15.25 ; v2(96.9,58.25) 88.842,58.25 88.56,57.968 74.252,57.968 73.97,58.25 v2(72.9,58.25) v2@48.85,58.25
7SEGMENT_E: DISP1.1 DISP2.1 DISP3.1 DISP4.1 DISP5.1 DISP6.1 DISP7.1 DISP8.1 DISP9.1 DISP10.1 DISP11.1 DISP12.1 R53.2 | length 379.2
  Top Layer w0.508: R53.2@79.9,72.5 79.9,73.65 78.8,74.75 78.8,85.4 81.15,87.75 v1(83.5,87.75) ; DISP4.1@99.4,15.25 99.4,17.5 99.9,18 102.5,18 105,20.5 105,54.25 ; DISP5.1@99.4,54.25 105,54.25 ; DISP12.1@99.4,92.75 101.75,92.75 105,89.5 105,54.25
  Bottom Layer w0.508: DISP1.1@27.1,15.25 27.1,16.5 28.576,17.976 51.2,17.976 ; DISP8.1@27.1,54.25 27.1,56.4 27.3,56.6 75.3,56.6 ; DISP9.1@27.1,92.75 27.1,95.85 27.75,96.5 42.2,96.5 43.3,95.4 51.1,95.4 51.2,95.5 ; DISP2.1@51.2,15.25 51.2,17.976 ; DISP7.1@51.2,54.25 51.2,56.5 ; DISP10.1@51.2,92.75 51.2,95.5 ; 75.1,96.5 75.5,96.5 ; DISP3.1@75.3,15.25 75.3,18 ; DISP6.1@75.3,54.25 75.3,56.7 98.7,56.7 99.4,56 DISP5.1@99.4,54.25 ; DISP11.1@75.3,92.75 75.5,92.95 75.5,96.5 ; v1(83.5,87.75) 86.34,87.75 86.39,87.8 87.822,87.8 90.538,90.516 98.954,90.516 99.4,90.962 DISP12.1@99.4,92.75 99.6,92.95 99.6,95.3 99.1,95.8 95.9,95.8 95.2,96.5 75.5,96.5 ; DISP4.1@99.4,15.25 99.4,17.15 98.55,18 75.3,18 ; 51.2,17.976 58.476,17.976 58.5,18 75.3,18 ; 51.2,95.5 52.4,96.7 71.244,96.7 71.569,96.376 73.031,96.376 73.252,96.597 75.5,96.597 75.5,96.5
7SEGMENT_F: DISP1.9 DISP2.9 DISP3.9 DISP4.9 DISP5.9 DISP6.9 DISP7.9 DISP8.9 DISP9.9 DISP10.9 DISP11.9 DISP12.9 R54.2 | length 417.7
  Top Layer w0.508: v2(48.66,40.83) DISP2.9@48.66,45.73 ; DISP7.9@48.66,84.73 48.66,80.24 48.7,80.28 v2(48.7,80.75) ; DISP10.9@48.66,123.23 48.66,118.79 v2(48.7,118.75) ; v2(72.7,40.75) 72.76,40.81 DISP3.9@72.76,45.73 ; v2(72.7,80.75) 72.7,80.3 72.76,80.24 DISP6.9@72.76,84.73 ; v2(72.76,118.65) DISP11.9@72.76,123.23 ; R54.2@79.9,70 83.489,70 85.31,68.179 89.871,68.179 91.9,66.15 96.2,66.15 96.8,66.75 v2(96.8,80.75) ; v2(96.86,40.79) DISP4.9@96.86,45.73 ; v2@96.86,80.24 DISP5.9@96.86,84.73 ; DISP12.9@96.86,123.23 96.86,121.64 97.3,121.2 102.4,121.2 103.789,122.589 103.789,127.311 v2(103.2,127.9)
  Bottom Layer w0.508: DISP1.9@24.56,45.73 24.56,41.94 25.71,40.79 v2@48.7,40.79 ; DISP8.9@24.56,84.73 24.56,81.04 25.263,80.337 45.074,80.337 45.237,80.5 48.4,80.5 48.7,80.2 v2(48.7,80.75) ; DISP9.9@24.56,123.23 24.56,119.39 25.34,118.61 48.7,118.61 v2(48.7,118.75) 48.8,118.65 v2(72.76,118.65) 73.95,118.65 81.99,126.69 96.01,126.69 96.86,125.84 DISP12.9@96.86,123.23 DISP12.9@96.991,123.23 ; v2@48.65,80.25 49.15,80.75 v2(72.7,80.75) v2(96.8,80.75) 102,80.75 103.5,79.25 103.5,76.165 103.662,76.003 103.662,49.612 102.268,48.218 99.758,48.218 99.742,48.234 97.434,48.234 96.86,47.66 DISP4.9@96.86,45.73 ; v2(48.66,40.83) v2@48.7,40.79 ; v2(72.7,40.75) v2@72.7,40.79 ; v2(96.86,40.79) v2@72.7,40.79 ; DISP5.9@96.86,84.73 96.86,86.81 97.518,87.468 101,87.468 103.616,90.084 103.616,127.484 v2(103.2,127.9) ; v2@48.7,40.79 v2@72.7,40.79
7SEGMENT_G: DISP1.10 DISP2.10 DISP3.10 DISP4.10 DISP5.10 DISP6.10 DISP7.10 DISP8.10 DISP9.10 DISP10.10 DISP11.10 DISP12.10 R55.2 R65.2 | length 418
  Top Layer w0.508: R65.2@11,94 11,94.1 v1(12.4,95.5) ; R55.2@79.9,67.5 80.237,67.163 82.276,67.163 82.313,67.2 84.852,67.2 84.889,67.163 89.337,67.163 91.75,64.75 98.75,64.75 99.4,65.4 DISP5.10@99.4,84.73
  Bottom Layer w0.508: v1(12.4,95.5) 12.4,93.3 15.2,90.5 23.9,90.5 26.7,87.7 26.7,85.13 DISP8.10@27.1,84.73 27.1,82.4 28.147,81.353 44.653,81.353 46.05,82.75 51.2,82.75 ; DISP1.10@27.1,45.73 27.1,43.5 27.6,43 50.85,43 51.2,42.65 ; DISP9.10@27.1,123.23 27.3,123.03 27.3,120.7 27.6,120.4 51.2,120.4 ; DISP7.10@50.9,84.43 DISP7.10@51.2,84.73 51.2,82.75 ; DISP2.10@51.2,45.73 51.2,42.65 ; DISP10.10@51.2,123.23 51.2,120.3 72.6,120.3 75.3,123 DISP11.10@75.3,123.23 75.63,123.23 79.9,127.5 99.4,127.5 ; DISP3.10@75.3,45.73 75.3,42.65 ; 75.3,82.25 75.3,82.3 ; DISP6.10@75.3,84.73 75.3,82.3 ; DISP12.10@99.4,123.23 99.4,127.5 ; 104.567,84.73 DISP5.10@99.4,84.73 99.4,82.75 98.95,82.3 75.3,82.3 ; 51.2,42.65 51.647,42.203 70.903,42.203 71.35,42.65 75.3,42.65 ; 51.2,82.75 56.55,82.75 57,82.3 75.3,82.3 ; 75.3,42.65 76.3,42.65 76.947,42.003 86.9,42.003 87.522,42.625 98.425,42.625 99.4,43.6 DISP4.10@99.4,45.73 102.83,45.73 104.678,47.578 104.678,129.6 104.178,130.1 99.7,130.1 99.4,129.8 99.4,127.5
7SEGMENT_H: DISP1.5 DISP2.5 DISP3.5 DISP4.5 DISP5.5 DISP6.5 DISP7.5 DISP8.5 DISP9.5 DISP10.5 DISP11.5 DISP12.5 R56.2 | length 443.4
  Top Layer w0.508: v2(41,61.5) 41,61.48 40.8,61.28 v2@41.04,61.04 ; DISP2.5@41.04,15.25 41.04,22.44 v2(41.1,22.5) ; DISP7.5@41.04,54.25 v2@41.04,61.04 ; DISP10.5@41.04,92.75 v2(41.04,100.8) ; v2@41.2,61.2 v2@41.04,61.04 ; v2(65.1,61.5) 65.14,61.46 DISP6.5@65.14,54.25 ; v2(65.1,101) 65.1,92.79 DISP11.5@65.14,92.75 ; DISP3.5@65.14,15.25 65.3,15.41 65.2,15.51 v2(65.2,22.75) ; R56.2@80.15,64.75 R56.2@79.9,65 81.55,65 82.734,66.184 83.1,66.184 83.137,66.147 88.803,66.147 89.2,65.75 89.2,61.2 89.24,61.16 DISP5.5@89.24,54.25 89.24,51.16 90.15,50.25 100.45,50.25 102.3,48.4 102.3,23.6 101.45,22.75 v2(89.2,22.75) 89.24,22.71 DISP4.5@89.24,15.25 DISP4.5@89.24,14.653 ; v2(89.2,61.5) 100.55,61.5 101.6,62.55 101.6,86.4 100.5,87.5 90.65,87.5 89.24,88.91 DISP12.5@89.24,92.75 89.2,92.79 v2(89.2,101)
  Bottom Layer w0.508: DISP8.5@16.94,54.25 16.94,59.64 18.75,61.45 40.8,61.45 40.85,61.5 v2(41,61.5) 41.024,61.524 44.6,61.524 44.821,61.303 45.095,61.303 45.1,61.297 64.898,61.297 v2(65.1,61.5) ; DISP9.5@16.94,92.75 16.94,99.54 18.26,100.86 v2@41.1,100.86 ; v2(41.04,100.8) v2@41.1,100.86 ; v2@64.95,61.35 65.1,61.2 65.5,61.2 65.8,61.5 73.594,61.5 75.094,60 87.718,60 89.2,61.482 v2(89.2,61.5) ; v2(65.2,22.75) 66.65,22.75 ; v2(89.2,22.75) v2@89.05,22.75 ; v2(89.2,101) 41.24,101 v2@41.1,100.86 ; v2@89.3,22.5 v2@89.05,22.75 ; 18.15,22.5 v2@40.9,22.5 ; 18.15,22.5 17.6,22.5 16.9,21.8 16.9,15.29 DISP1.5@16.94,15.25 16.94,21.29 18.15,22.5 ; v2@40.9,22.5 41.1,22.3 v2(41.1,22.5) ; v2@40.9,22.5 v2(41.1,22.5) ; v2(41.1,22.5) 42.695,22.5 42.969,22.774 66.674,22.774 66.65,22.75 ; 66.65,22.75 67.245,22.75 67.595,23.1 88.2,23.1 88.55,22.75 v2@89.05,22.75
+5: C1.1 C3.1 C4.1 C7.1 C8.1 C9.1 C10.1 J1.2 P1.5 P1.6 P3.2 P5.4 P6.4 P7.1 P8.4 R57.2 R59.1 R60.1 R67.2 R73.2 R74.2 R75.2 R76.2 R77.2 R81.1 R82.1 R83.1 T25.2 U5.7 U5.28 U6.4 U7.8 U8.3 | length 525.7
  Top Layer w0.508: C1.1@2.3,133 4.4,133 C4.1@5.17,132.23 ; C3.1@40.9,65 41.65,65.75 C8.1@43.6,65.75 44.4,64.95 U5.7@50.65,64.95 56.65,64.95 57.45,65.75 U5.28@61.95,65.75
  Top Layer w0.762: C1.1@2.3,133 2.6,133.3 2.6,135.25 3.1,135.75 40.94,135.75 U6.4@43.44,133.25 ; 4.3,60.7 4.35,60.75 10,60.75 ; v1(5.9,91.75) 6.4,92.25 9.755,92.25 T25.2@11.1,90.905 ; v1(7.2,27.3) v1@7.2,27.25 ; U8.3@7.7,113.85 7.8,113.75 v1(7.8,111.55) ; v1(8.5,73.5) 5.55,73.5 4.3,72.25 4.3,45.75 ; R75.2@9.8,57.5 10,57.7 10,60.75 ; R60.1@9.9,50.75 R59.1@9.9,48.25 R77.2@9.9,45.75 ; R74.2@10,41.25 9.9,41.35 9.9,42.5 ; R76.2@10,63.75 10,60.75 ; P7.1@15,23.9 12.3,23.9 11.9,23.5 11.9,25.85 10.5,27.25 v1@7.2,27.25 ; P6.4@24.32,51.25 24.32,49.13 24.95,48.5 34.262,48.5 ; R83.1@24.5,128.8 R82.1@27.5,128.8 ; R82.1@27.6,128.7 29.7,128.7 v1(29.8,128.8) ; v1(37.9,51.75) C10.1@34.3,51.75 ; C3.1@40.9,65 39.2,63.3 39.2,57.25 36.7,54.75 C9.1@34.8,54.75 34.8,52.25 C10.1@34.3,51.75 ; v1(53.3,122.8) 54.65,122.8 R81.1@55.2,122.25 56.495,120.955 U7.8@56.495,118.1 ; v1(62.7,10.1) 62.5,9.9 63.65,8.75 73.4,8.75 ; P1.6@73,49 P1.6@73.1,49 P1.5@75.64,49 ; P5.4@73.52,11.5 73.52,8.87 73.4,8.75 ; R57.2@84.1,15.5 84.1,12.14 P3.2@84.74,11.5 84.74,9.79 83.7,8.75 73.4,8.75 ; 4.3,45.75 R77.2@9.9,45.75 ; 4.3,45.75 4.3,28.45 5.5,27.25 v1@7.2,27.25 ; 9.9,42.5 R77.2@9.9,45.75 ; 9.9,42.5 32.55,42.5 34.3,44.25 C10.1@34.3,51.75
  Top Layer w1.016: R67.2@73.4,7.25 73.4,8.75
  Bottom Layer w0.762: v1(5.9,91.75) 7.67,91.75 ; v1(7.2,27.3) 8.9,25.6 8.9,14.55 13.35,10.1 v1(62.7,10.1) ; P8.4@7.4,133.72 7.72,133.4 11.7,133.4 ; v1(7.8,111.55) 7.8,116.1 11.7,120 11.7,133.4 ; v1@7.9,111.45 7.7,111.25 7.7,102.7 ; v1(8.5,73.5) 8.5,86.65 7.67,87.48 7.67,91.75 ; C7.1@10.082,102.63 7.77,102.63 7.7,102.7 ; v1(29.8,128.8) 29.8,134.7 29.5,135 ; v1(37.9,51.75) 54.35,51.75 55.6,53 61.2,53 65.2,49 P1.6@73.1,49 P1.5@75.64,49 ; U6.4@43.44,133.25 43.44,134.84 43.6,135 ; v1(53.3,122.8) 53.3,127.15 55,128.85 J1.2@55,130.5 55,133.5 53.5,135 43.6,135 ; 7.67,91.75 7.67,100.25 7.7,100.28 7.7,102.7 ; 11.7,133.4 13.3,135 29.5,135 ; 29.5,135 43.6,135